# EAGLE board nomis-memory-game-v01 (EAGLE 6.0)
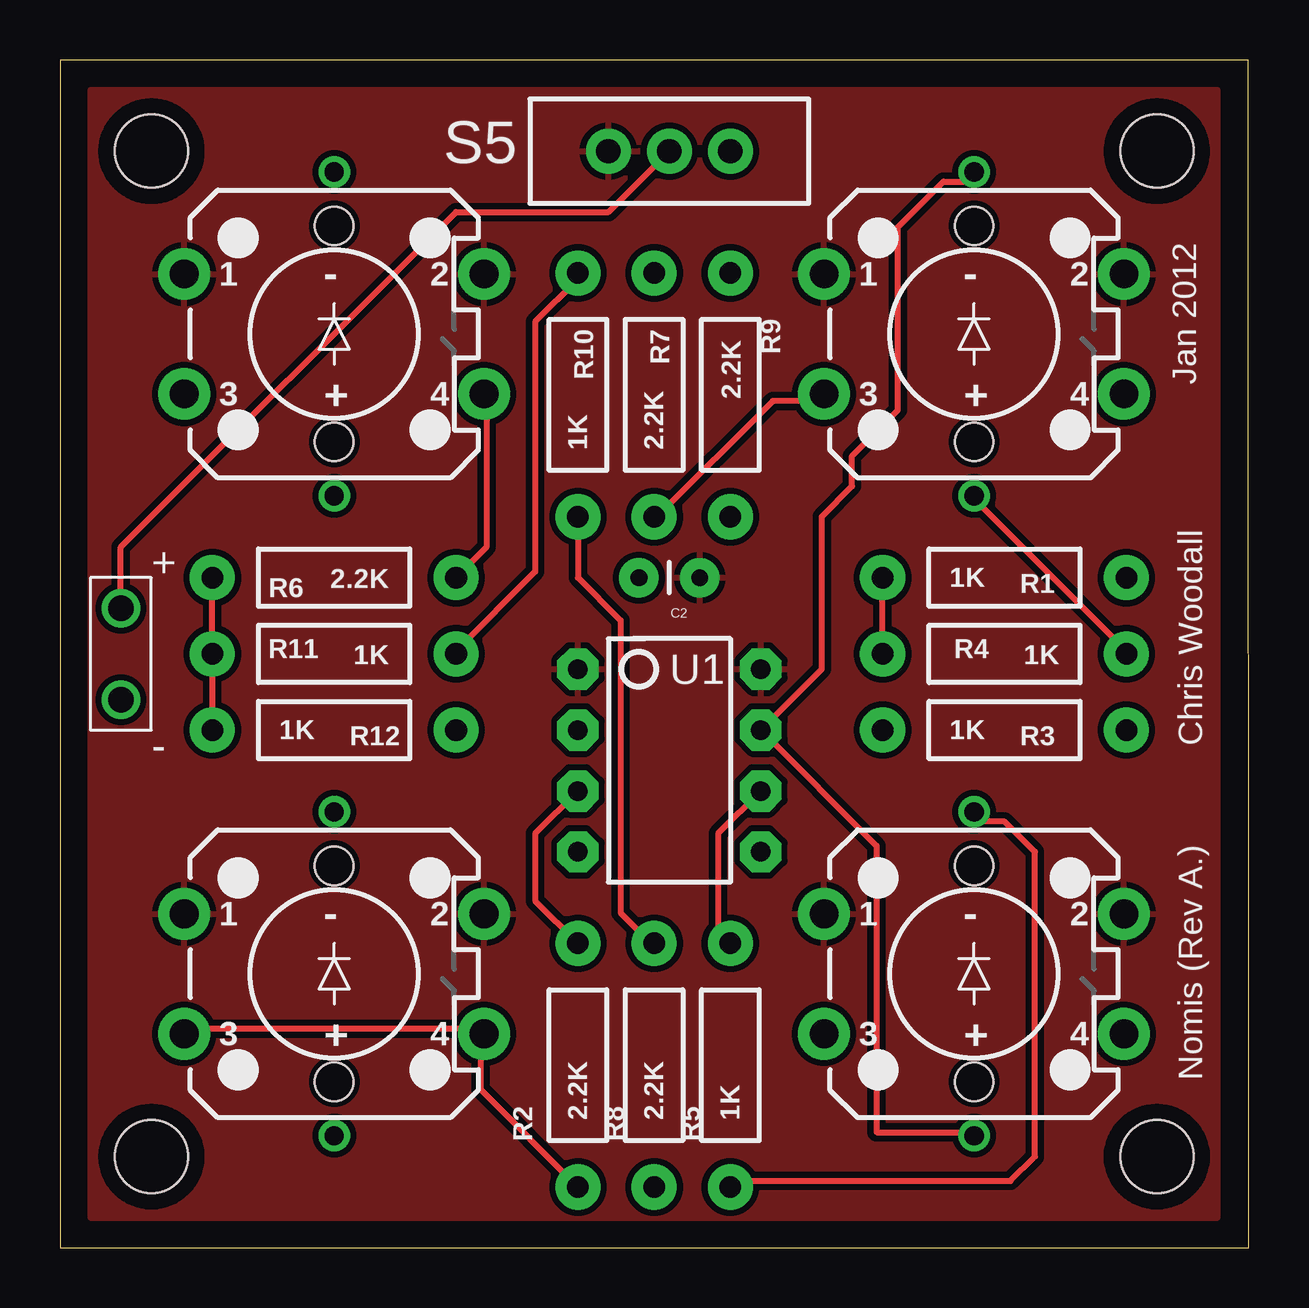
[diagram p0: board, top side]
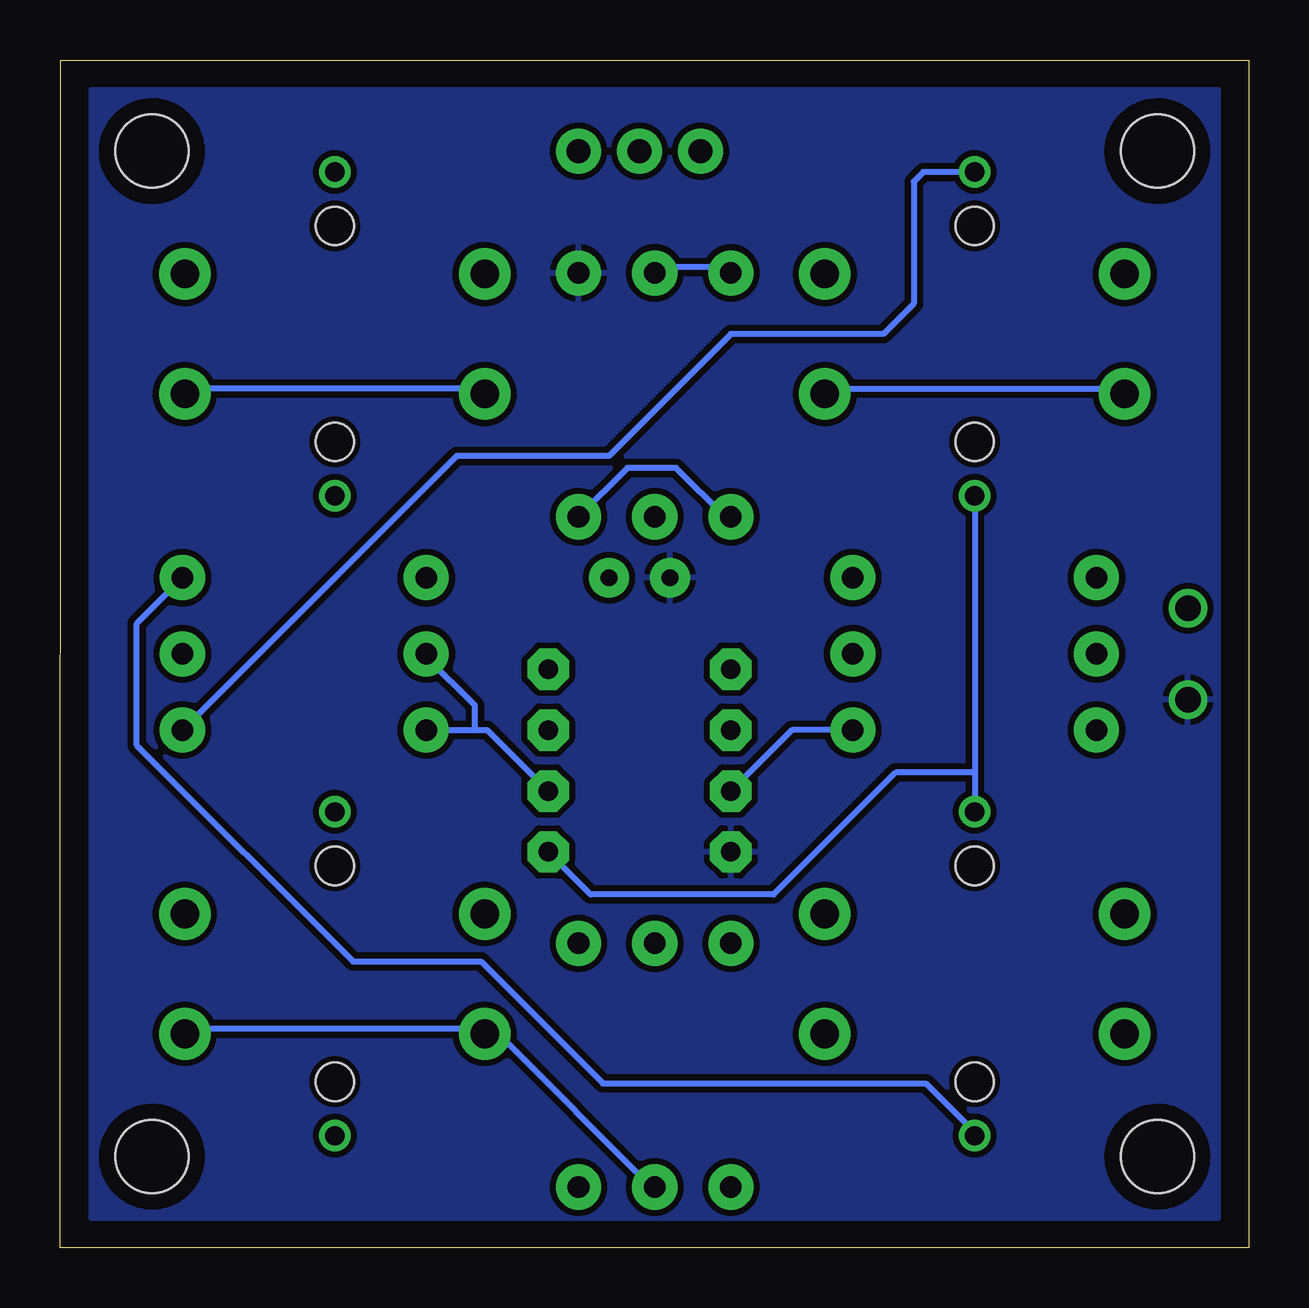
[diagram p1: board, bottom side, seen from below]

Size 49.56 x 49.52 mm. Coordinates in mm from the lower left corner, seen from the top.
Outline: 0,0 49.56,0 49.53,49.52 0,49.52 0,0
Copper layers (1*16): Top 0.035mm / dielectric 1.5mm / Bottom 0.035mm
Design rules: minimum track width 6mil, minimum drill 12mil, track to track 6mil, track to pad 6mil, pad to pad 6mil, via to via 6mil, smd to smd 0mil, copper to edge 10mil, drill to drill 10mil, minimum pad ring 10mil, minimum via ring 6mil, stop-mask expansion 2mil, vias tented up to drill 100mil, thermal gap 10mil
Net classes: 0 default: width 0.254 mm

## Footprints (pad centres in the part's own frame; a part is rotated, then mirrored left to right if it is on the bottom)
1X02_BIG = drill 1.067: P$1 0,0; P$2 3.81,0
CAP-PTH-SMALL = drill 0.7 pad 1.651: 1 0,0; 2 2.54,0
STAND-OFF-TIGHT = hole 3.048: 0,0
AXIAL-0.4 = drill 0.9 pad 1.88: P$1 -5.08,0; P$2 5.08,0
TACTILE-PTH-LED-12MM = drill 1.2 pad 2.159: 1 -6.25,2.5; 2 6.25,2.5; 3 -6.25,-2.5; 4 6.25,-2.5 | drill 0.8: A 0,6.75; C 0,-6.75 | hole 1.6: 0,4.5; 0,-4.5
SWITCH-SPDT = drill 1.016 pad 1.88: 1 0,2.54; 2 0,0; 3 0,-2.54
DIP08 = drill 0.813 pad 1.727 octagon: 1 -3.81,-3.81; 2 -1.27,-3.81; 3 1.27,-3.81; 4 3.81,-3.81; 5 3.81,3.81; 6 1.27,3.81; 7 -1.27,3.81; 8 -3.81,3.81

## Placement (x,y rotation side)
BATT1  2AA External Connector  [1X02_BIG]  2.54,22.86 90 top
C2  .1uF  [CAP-PTH-SMALL]  26.67,27.94 180 top
JP1  STAND-OFFTIGHT  [STAND-OFF-TIGHT]  3.81,3.81 0 top
JP2  STAND-OFFTIGHT  [STAND-OFF-TIGHT]  45.72,3.81 0 top
JP3  STAND-OFFTIGHT  [STAND-OFF-TIGHT]  45.72,45.72 0 top
JP4  STAND-OFFTIGHT  [STAND-OFF-TIGHT]  3.81,45.72 0 top
R1  1K  [AXIAL-0.4]  39.37,27.94 0 top
R2  2.2K  [AXIAL-0.4]  21.59,7.62 90 top
R3  1K  [AXIAL-0.4]  39.37,21.59 0 top
R4  1K  [AXIAL-0.4]  39.37,24.77 180 top
R5  1K  [AXIAL-0.4]  27.94,7.62 90 top
R6  2.2K  [AXIAL-0.4]  11.43,27.94 180 top
R7  2.2K  [AXIAL-0.4]  24.77,35.56 90 top
R8  2.2K  [AXIAL-0.4]  24.77,7.62 90 top
R9  2.2K  [AXIAL-0.4]  27.94,35.56 270 top
R10  1K  [AXIAL-0.4]  21.59,35.56 90 top
R11  1K  [AXIAL-0.4]  11.43,24.77 180 top
R12  1K  [AXIAL-0.4]  11.43,21.59 0 top
S1  SWITCH-MOMENTARY-LED-SPLIT  [TACTILE-PTH-LED-12MM]  38.1,11.43 0 top
S2  SWITCH-MOMENTARY-LED-SPLIT  [TACTILE-PTH-LED-12MM]  38.1,38.1 0 top
S3  SWITCH-MOMENTARY-LED-SPLIT  [TACTILE-PTH-LED-12MM]  11.43,38.1 0 top
S4  SWITCH-MOMENTARY-LED-SPLIT  [TACTILE-PTH-LED-12MM]  11.43,11.43 0 top
S5  [SWITCH-SPDT]  25.4,45.72 90 top
U1  ATTINY85-DIP8  [DIP08]  25.4,20.32 270 top

## Library data of the parts
BATT1 C2 JP1-JP4 R1-R12 S5 U1 = SparkFun
S1-S4 = nomis-memory-game

## Nets
GND: BATT1.P$1 C2.2 R9.P$1 U1.4
N$1: R3.P$2 S3.A
N$2: R4.P$1 S2.C
N$3: R5.P$1 S1.A
N$4: R1.P$2 S4.C
N$5: R1.P$1 R3.P$1 R4.P$2 R5.P$2 U1.6
N$6: S1.C S2.A U1.7
N$7: S3.C S4.A U1.5
N$8: R8.P$2 R9.P$2 R10.P$1
N$9: R7.P$2 R10.P$2 R11.P$1
N$10: BATT1.P$2 S5.2
N$11: R2.P$2 R12.P$2 U1.3
N$12: R2.P$1 S4.3 S4.4
N$13: R6.P$1 S3.3 S3.4
N$14: R7.P$1 S2.3 S2.4
N$15: R8.P$1 S1.3 S1.4
N$16: R6.P$2 R11.P$2 R12.P$1
VCC: C2.1 S1.1 S1.2 S2.1 S2.2 S3.1 S3.2 S4.1 S4.2 S5.1 U1.1 U1.8

## Tracks (layer width: path | path; a pad name or v marks a point on that pad's centre or on a via)
GND
  pour Bottom (isolate 0.254): 1.27,48.26 48.26,48.26 48.26,1.27 1.27,1.27
N$1
  Bottom 0.254: R3.P$2 44.2,21.59 44.2,21.84 33.02,33.02 26.67,33.02 21.59,38.1 15.24,38.1 13.97,39.37 13.97,44.45 13.57,44.85 S3.A
N$2
  Top 0.254: S2.C 38.1,31.24 44.45,24.89 R4.P$1
N$3
  Top 0.254: R5.P$1 27.94,2.79 39.62,2.79 40.64,3.81 40.64,16.51 39.37,17.78 38.1,17.78 S1.A 38.1,18.29
N$4
  Bottom 0.254: S4.C 11.43,4.83 13.46,6.86 26.92,6.86 32,11.94 37.34,11.94 46.35,20.95 46.35,26.04 R1.P$2
N$5
  Top 0.254: U1.6 27.43,17.27 27.43,13.21 R5.P$2 | R4.P$2 R1.P$1
  Bottom 0.254: U1.6 31.75,21.59 32.26,21.59 | R3.P$1 32.26,21.59 | 32.26,21.59 32.26,22.61 34.29,24.64 R4.P$2
N$6
  Top 0.254: S1.C 38.1,4.83 34.04,4.83 34.04,16.76 U1.7 31.75,24.13 31.75,30.48 33.02,31.75 33.02,33.02 34.92,34.92 34.92,42.55 36.83,44.45 38.1,44.45 S2.A
N$7
  Bottom 0.254: S3.C 11.43,19.81 | 11.43,19.81 S4.A | U1.5 27.43,14.73 19.81,14.73 14.73,19.81 11.43,19.81
N$8
  Top 0.254: R10.P$1 21.59,27.94 23.37,26.16 23.37,13.97 24.64,12.7 R8.P$2
  Bottom 0.254: R9.P$2 25.91,32.51 23.88,32.51 21.84,30.48 R10.P$1
N$9
  Top 0.254: R10.P$2 21.59,40.39 19.81,38.61 19.81,28.19 16.51,24.89 R11.P$1
  Bottom 0.254: R10.P$2 21.84,40.89 24.38,40.89 24.64,40.64 R7.P$2
N$10
  Top 0.254: BATT1.P$2 2.54,29.21 16.51,43.18 22.86,43.18 S5.2
N$11
  Top 0.254: R2.P$2 19.81,14.48 19.81,17.27 U1.3
  Bottom 0.254: U1.3 19.05,21.59 R12.P$2
N$12
  Top 0.254: R2.P$1 17.53,6.6 17.53,8.89 S4.4 17.53,9.14 5.33,9.14 S4.3
N$13
  Top 0.254: R6.P$1 17.78,29.21 17.78,35.56 S3.4
  Bottom 0.254: S3.3 5.33,35.81 17.53,35.81 S3.4
N$14
  Top 0.254: R7.P$1 24.89,30.48 29.72,35.31 31.75,35.31 31.75,35.56 S2.3
  Bottom 0.254: S2.4 44.2,35.81 32,35.81 S2.3
N$15
  Bottom 0.254: R8.P$1 24.89,2.54 31.24,8.89 31.75,8.89 S1.3 32,9.14 44.2,9.14 S1.4
N$16
  Top 0.254: R12.P$1 R11.P$2 R6.P$2
VCC
  pour Top (isolate 0.254): 48.26,1.27 48.26,48.26 1.27,48.26 1.27,1.27

## Text on the board
tPlace: Jan 2012 | + | Chris Woodall | - | Nomis (Rev A.) | /Users/cwoodall/Downloads/Untitled-1.bmp